# Altium PCB main.PcbDoc
Units mm, origin at the board's own origin, x right, y up, seen from the top; angles counter-clockwise.
Board outline 187.3 x 121.8 mm, 2 copper layers (Top Layer, Bottom Layer); 110 components, 126 nets, 418 pads, 274 vias.
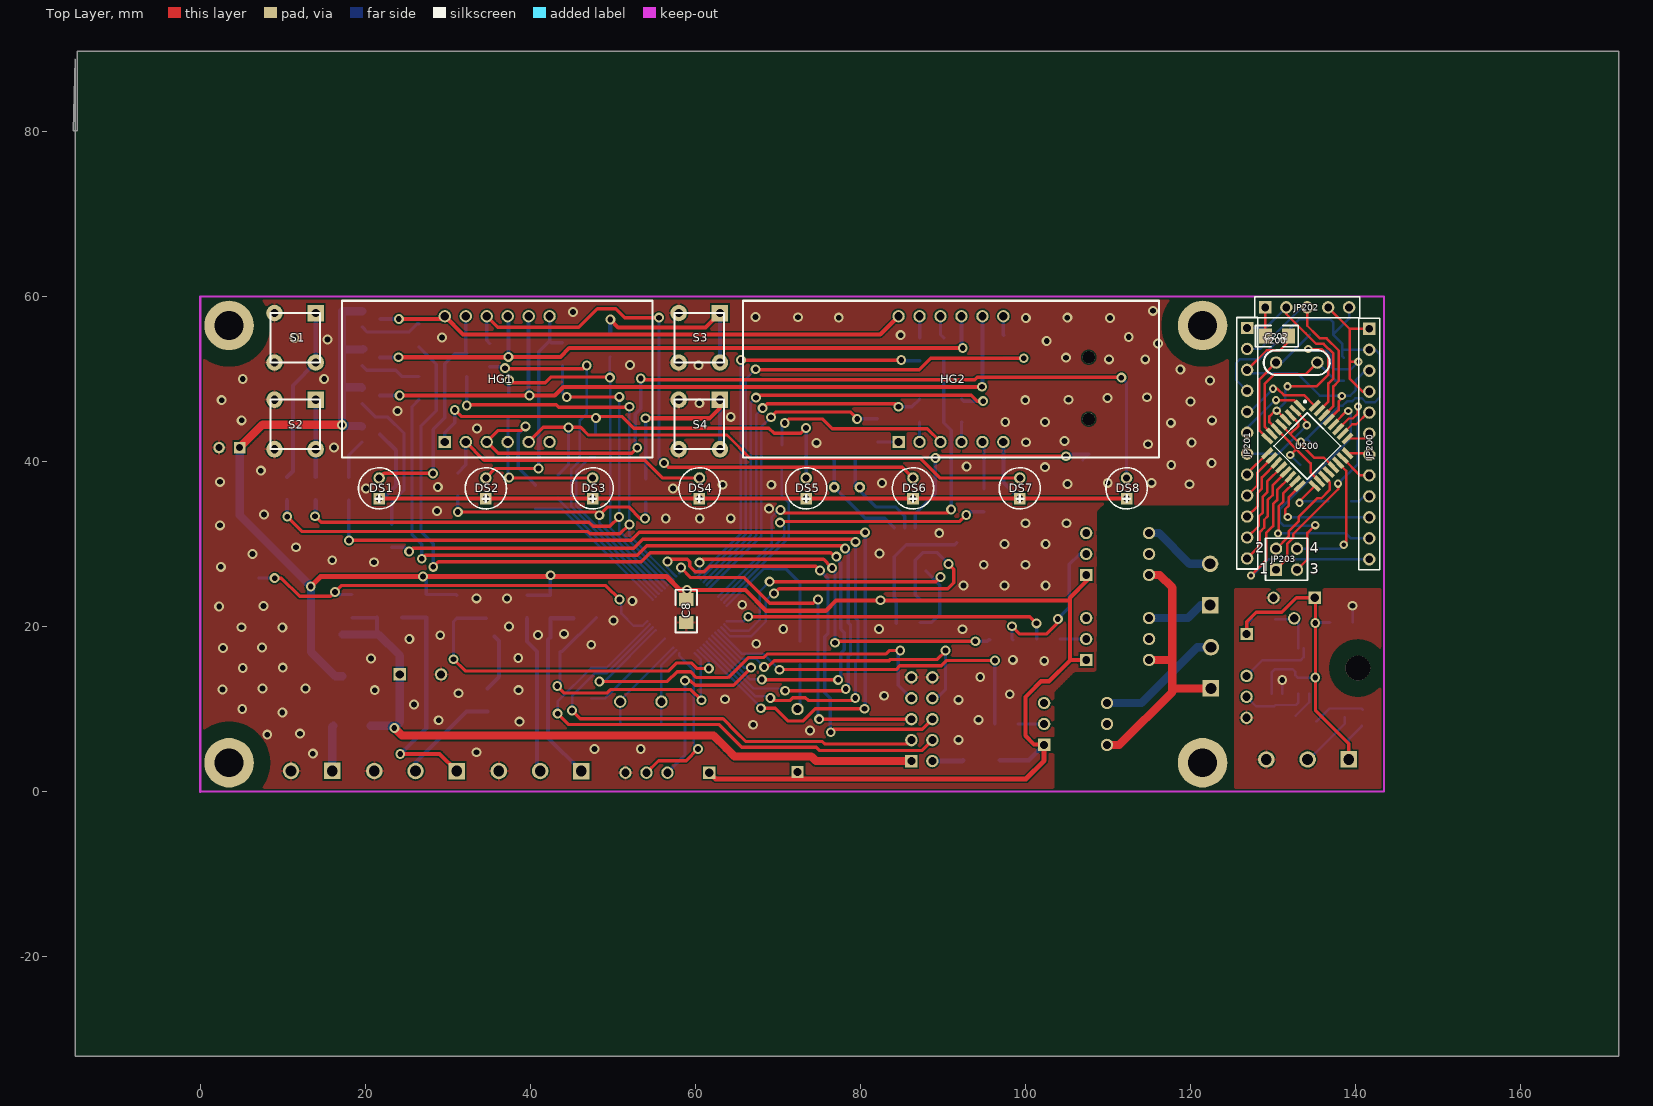
[diagram p0: Top Layer view]
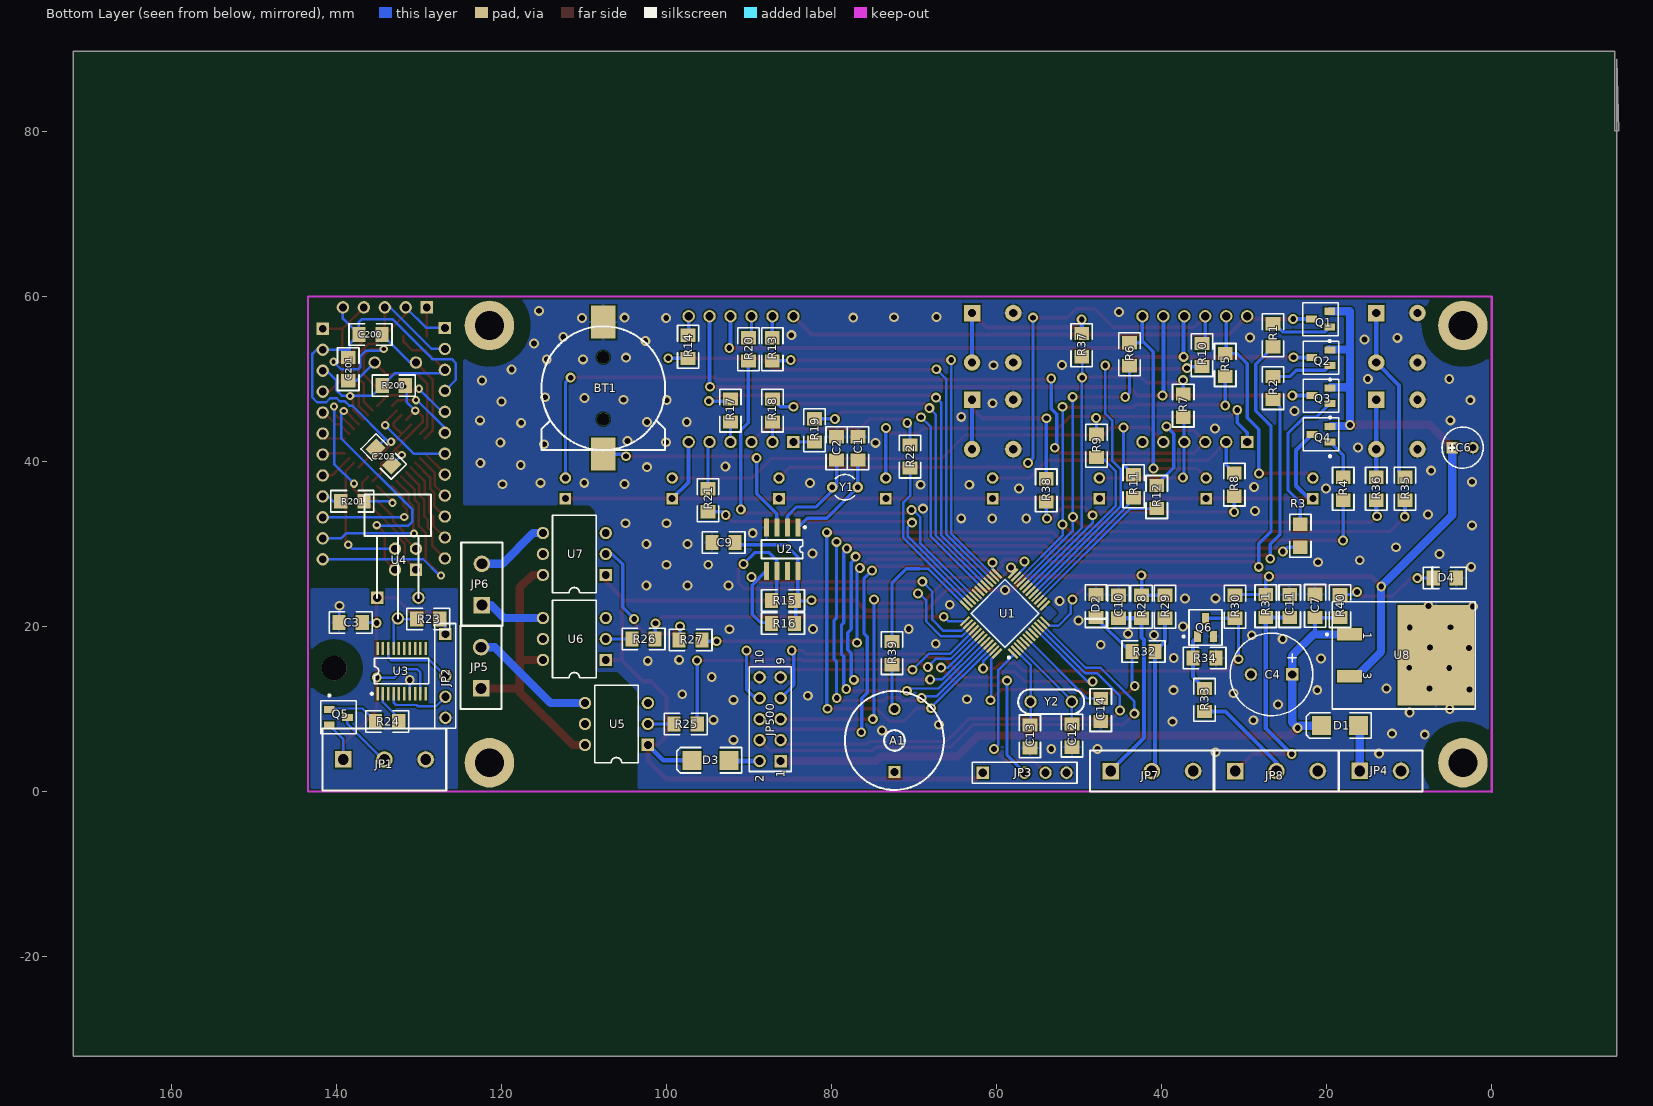
[diagram p1: Bottom Layer view, seen from below]

## Layer stack, top to bottom
Top Layer: signal copper 0.0356
Dielectric: dielectric 0.32, FR-4, Dk 4.8
Bottom Layer: signal copper 0.0356

## Board outline
-15.15,88.8 -15.15,-32.075 171.925,-32.075 171.925,89.725 -14.925,89.725 -14.925,80.075 -15.375,80.075

## Design rules (kind name [scope] priority, off if disabled: settings)
Clearance Clearance_1 [HasPad('Free-0') vs InPoly] p1: gap=2
Clearance [All] p2: gap=0.2
ComponentClearance [All] p1: gap=0.254 collisioncheckmode=0
HoleSize [All] p1: absolutevalues=TRUE maxlimit=5 minlimit=0.025 maxpercent=80.000 minpercent=20.000
PolygonConnect [All] p1: connectstyle=Relief reliefconductorwidth=0.254 reliefentries=4 polygonreliefangle="90 Angle"
RoutingLayers [All] p1: top layer=Horizontal bottom layer=Vertical
RoutingVias [All] p1: holewidth=0.6 width=1.1 viastyle="Through Hole" minholewidth=0.6 minwidth=1.1 maxholewidth=1 maxwidth=1.5
SolderMaskExpansion [All] p1: expansion=0.102
TestPointUsage [All] p1: valid=0 allowmultiple=FALSE
Testpoint [All] p1: side=15 testpointundercomponent=TRUE minsize=1.016 maxsize=2.54 preferedsize=1.524 minholesize=0 maxholesize=1.016 preferedholesize=0.813 testpointgrid=0.025 style=1023 order=-539222988
Width [All] p1: maxlimit=3 minlimit=0.2 preferedwidth=0.254 toplayer_prefwidth=0.3 bottomlayer_prefwidth=0.3 minimp=50.000000 maximp=50.000000 favimp=50.000000
15 further rules are at their usual default settings.

## Classes and differential pairs
component class AM: C200 C201 C202 C203 JP200 JP201 JP202 JP203 R200 R201 U200 Y200
component class Dat: C3 JP1 JP2 Q5 R23 R24 U3 U4
component class main: A1 BT1 C1 C2 C4 C6 C7 C8 C9 C10 C11 C12 C13 C14 D1 D2 D3 D4 DS1 DS2 DS3 DS4 DS5 DS6 DS7 DS8 HG1 HG2 JP3 JP4 JP5 JP6 JP7 JP8 JP500 Q1 Q2 Q3 Q4 Q6 R1 R2 R3 R4 R5 R6 R7 R8 R9 R10 R11 R12 R13 R14 R15 R16 R17 R18 R19 R20 R21 R22 R25 R26 R27 R28 R29 R30 R31 R32 R33 R34 R35 R36 R37 R38 R39 R40 S1 S2 S3 S4 U1 U2 U5 U6 U7 U8 Y1 Y2

## Components (designator, comment, footprint, x,y, rotation, side; value= is the part's Value field where it differs from the comment)
A1 "EFM260" zumm 72.4,6.2 r90 bottom
BT1 "CR2032" 1220_holder 107.7,48.9 r270 bottom
C1 "10" _1206 76.8,41.6 r270 bottom
C2 "10" _1206 79.4,41.6 r270 bottom
C3 "1.0" _1206 138.324,20.5 r0 bottom
C4 "" el5 29.2,14.2 r180 bottom
C6 "" el3 4.8,41.7 r180 bottom
C7 "Cap" _1206 21.4,22.5 r270 bottom
C8 "Cap" _1206 58.9,21.9 r90 top
C9 "Cap" _1206 93.1,30.2 r180 bottom
C10 "Cap" _1206 45.25,22.425 r90 bottom
C11 "Cap" _1206 24.5,22.5 r90 bottom
C12 "10" _1206 50.9,6.8 r90 bottom
C13 "10" _1206 56,6.7 r90 bottom
C14 "1.0" _1206 47.4,9.9 r90 bottom
C200 "10" _1206 135.9,55.4 r180 bottom
C201 "10" _1206 138.6,51.2 r270 bottom
C202 "1n0" _1206 130.5,55.2 r180 top
C203 "1.0" _1206 134.3,40.6 r225 bottom
D1 "10BQ100" DSO-C2/X2.3#1 18.4,8 r0 bottom
D2 "C5V6" _1206d 48,22.5 r90 bottom
D3 "10BQ100" DSO-C2/X2.3#2 94.7,3.8 r0 bottom (schematic designator D?)
D4 "C5V6" _1206d 5.7,25.9 r180 bottom
DS1 "LED0" el3 21.675,35.5 r90 top
DS2 "LED0" el3 34.618,35.5 r90 top
DS3 "LED0" el3 47.561,35.5 r90 top
DS4 "LED0" el3 60.504,35.5 r90 top
DS5 "LED0" el3 73.446,35.5 r90 top
DS6 "LED0" el3 86.389,35.5 r90 top
DS7 "LED0" el3 99.332,35.5 r90 top
DS8 "LED0" el3 112.275,35.5 r90 top
HG1 "HS310561K" HS310561K 36,50 r0 top
HG2 "HS410561K" HS410561K 91,50 r0 top
JP1 "Header 3" BT5-3 139.224,3.9 r180 bottom
JP2 "" HDR1X5_uart 126.824,19.1 r270 bottom
JP3 "" HDR1X5_uart 61.7,2.3 r180 bottom
JP4 "Header 2" BT5-2 16.012,2.5 r180 bottom
JP5 "Header 2" BT5-2 122.5,12.5 r90 bottom
JP6 "Header 2" BT5-2 122.4,22.6 r90 bottom
JP7 "Header 3" BT5-3 46.2,2.5 r180 bottom
JP8 "Header 3" BT5-3 31.1,2.5 r180 bottom
JP200 "Header 12" HDR1X12 141.7,56.1 r270 top
JP201 "Header 12" HDR1X12 126.9,56.2 r270 top
JP202 "Header 5" HDR1X5 129.1,58.7 r0 top
JP203 "Header 2X2H" HDR2X2 130.4,26.9 r0 top
JP500 "IDC-10" HDR2X5 86.2,3.7 r90 bottom
Q1 "BC807" SO-G3#1 20.75,57.274 r90 bottom
Q2 "BC807" SO-G3#2 15.7,52.6 r90 bottom
Q3 "BC807" SO-G3#1 20.7,48 r90 bottom
Q4 "BC807" SO-G3#1 20.7,43.3 r90 bottom
Q5 "BC807" SO-G3#1 139.8,9 r270 bottom
Q6 "BC847" SO-G3#1 34.7,19.9 r180 bottom
R1 "Res2" _1206 26.5,55.3 r270 bottom
R2 "Res2" _1206 26.5,48.9 r270 bottom
R3 "Res2" _1206 23.2,31 r270 bottom
R4 "Res2" _1206 18,36.7 r270 bottom
R5 "Res2" _1206 32.3,51.7 r270 bottom
R6 "Res2" _1206 43.9,53 r270 bottom
R7 "Res2" _1206 37.4,46.8 r90 bottom
R8 "Res2" _1206 31.2,37.2 r270 bottom
R9 "Res2" _1206 47.9,41.9 r270 bottom
R10 "Res2" _1206 35.1,52.9 r270 bottom
R11 "Res2" _1206 43.4,37 r270 bottom
R12 "Res2" _1206 40.6,35.7 r270 bottom
R13 "Res2" _1206 87.2,53.6 r270 bottom
R14 "Res2" _1206 97.4,53.9 r270 bottom
R15 "Res2" _1206 85.925,23.175 r0 bottom
R16 "Res2" _1206 85.925,20.375 r0 bottom
R17 "Res2" _1206 92.3,46.2 r90 bottom
R18 "Res2" _1206 87.2,46.2 r90 bottom
R19 "Res2" _1206 82.1,43.8 r90 bottom
R20 "Res2" _1206 90.1,53.6 r270 bottom
R21 "Res2" _1206 95,35.3 r270 bottom
R22 "Res2" _1206 70.5,40.6 r270 bottom
R23 "Res2" _1206 128.924,20.9 r0 bottom
R24 "Res2" _1206 133.9,8.5 r0 bottom
R25 "Res2" _1206 97.7,8.2 r180 bottom
R26 "Res2" _1206 102.8,18.5 r180 bottom
R27 "Res2" _1206 97.1,18.4 r180 bottom
R28 "Res2" _1206 42.45,22.425 r90 bottom
R29 "Res2" _1206 39.6,22.4 r270 bottom
R30 "Res2" _1206 31.1,22.4 r270 bottom
R31 "Res2" _1206 27.4,22.5 r90 bottom
R32 "4K7" _1206 42.2,17 r180 bottom
R33 "4K7" _1206 34.8,11.1 r270 bottom
R34 "10K" _1206 34.8,16.2 r180 bottom
R35 "Res2" _1206 10.5,36.7 r270 bottom
R36 "Res2" _1206 14,36.7 r270 bottom
R37 "Res2" _1206 49.7,54.1 r270 bottom
R38 "Res2" _1206 54,36.5 r270 bottom
R39 "Res2" _1206 72.7,16.8 r90 bottom
R40 "4K7" _1206 18.4,22.5 r90 bottom
R200 "10K" _1206 133.1,49.2 r0 bottom
R201 "1K0" _1206 138.1,35.2 r180 bottom (schematic designator R?)
S1 "SWT-6" SWT-6 14,58 r270 top
S2 "SWT-6" SWT-6 14,47.5 r270 top
S3 "SWT-6" SWT-6 63,58 r270 top
S4 "SWT-6" SWT-6 63,47.5 r270 top
U1 "STM8S007C8" F-QFP7X7-G48/X.3N 59,21.6 r45 bottom
U2 "DS1307Z" SO-G8/Z7.45 86.025,29.375 r0 bottom
U3 "STM8S103F" TSSO6x6-G20/Y1.6 132.124,14.6 r180 bottom
U4 "DS18B20" DS18B20_H 135.1,21 r90 bottom
U5 "Opto TRIAC" DIP-6 106.1,8.2 r90 bottom
U6 "Opto TRIAC" DIP-6 111.2,18.5 r90 bottom
U7 "Opto TRIAC" DIP-6 111.2,28.8 r90 bottom
U8 "MC7805ACD2T" D2PAK 12,16.5 r270 bottom
U200 "ATmega8" QFP7X7-G32/X.5N 134.2,41.9 r315 top
Y1 "32768" BCY-W2/D3.1 78.4,36.9 r270 bottom
Y2 "10MGz" qwarz1 50.9,10.9 r0 bottom
Y200 "16MGz" qwarz1 130.4,52 r0 top

## Footprints (in the part's own frame and the unit in brackets; to place one, negate y for a bottom-side part, rotate by r counter-clockwise, add the part's x,y. Pads: shape width x height; smd on the part's side, far side on the other; paste and mask are expansions set on the pad)
1220_holder [mm]
  round 1.5 hole 1.5: 0(-3.75,0) 0(3.75,0)
  rect 4x3 smd: 1(8,0) 2(-8,0)
  silkscreen extent -7.5,-7.5 7.52,7.5
_1206 [mm]
  rect 1.6x1.8 smd: 1(-1.412,-0.007) 2(1.388,-0.007)
  silkscreen extent -2.61,-1.31 2.59,1.29
_1206d [mm]
  rect 1.6x1.8 smd: 1(1.395,-0.009) 2(-1.405,-0.009)
  silkscreen extent -2.6,-1.31 2.6,1.29
BCY-W2/D3.1 [mm]
  round 1.3 hole 0.7: 1(0,1.55) 2(0,-1.55)
  silkscreen extent -1.55,-1.19 1.55,1.17
BT5-2 [mm]
  rect 2x2 hole 1.3: 1(0.006,0.008)
  round 2 hole 1.3: 2(5.006,0.008)
  silkscreen extent -2.49,-2.49 7.61,2.51
BT5-3 [mm]
  round 2 on Bottom Overlay: 0(-0.001,-4.001)
  rect 2x2 hole 1.3: 1(-0.001,-0.001)
  round 2 hole 1.3: 2(4.999,-0.001) 3(9.999,-0.001)
  silkscreen extent -2.5,-3.75 12.5,3.75
D2PAK [mm]
  rect 1.5x3 smd: 1(-2.558,-5.253) 3(2.522,-5.253)
  rect 12.2x9.3 smd: 4(-0.018,5.247)
  silkscreen extent -6.52,-8.1 6.48,10
DIP-6 [mm]
  rect 1.5x1.5 hole 0.95: 1(-2.54,-3.81)
  round 1.5 hole 0.95: 2(0,-3.81) 3(2.54,-3.81) 4(2.54,3.81) 5(0,3.81) 6(-2.54,3.81)
  silkscreen extent -4.7,-2.65 4.7,2.65
DS18B20_H [mm]
  rect 1.5x1.5 hole 1: 1(2.5,0)
  round 1.5 hole 1: 2(0,-2.5) 3(2.5,-5)
  silkscreen extent 0,-6.53 15,1.53
DSO-C2/X2.3#1 [mm]
  rect 2.3x2.3 smd: 1(-2.252,0.001) 2(2.248,0.001)
  silkscreen extent -3.8,-1.55 4.1,1.55
DSO-C2/X2.3#2 [mm]
  rect 2.3x2.3 smd: 1(-2.25,0) 2(2.25,0)
  silkscreen extent -3.8,-1.55 4.1,1.55
el3 [mm]
  rect 1.4x1.4 hole 0.85: 1(0.011,-0.008)
  round 1.4 hole 0.85: 2(2.511,-0.008)
  silkscreen extent -1.24,-2.51 3.76,2.49
el5 [mm]
  rect 1.5x1.5 hole 1: 1(5.001,0.007)
  round 1.5 hole 1: 2(0.001,0.007)
  silkscreen extent -2.5,-4.99 7.5,5.01
F-QFP7X7-G48/X.3N [mm]
  rect 1.6x0.3 smd: 1(-4.1,2.75) 2(-4.1,2.25) 3(-4.1,1.75) 4(-4.1,1.25) 5(-4.1,0.75) 6(-4.1,0.25) 7(-4.1,-0.25) 8(-4.1,-0.75) 9(-4.1,-1.25) 10(-4.1,-1.75) 11(-4.1,-2.25) 12(-4.1,-2.75) 25(4.1,-2.75) 26(4.1,-2.25) 27(4.1,-1.75) 28(4.1,-1.25) 29(4.1,-0.75) 30(4.1,-0.25) 31(4.1,0.25) 32(4.1,0.75) 33(4.1,1.25) 34(4.1,1.75) 35(4.1,2.25) 36(4.1,2.75)
  rect 0.3x1.6 smd: 13(-2.75,-4.1) 14(-2.25,-4.1) 15(-1.75,-4.1) 16(-1.25,-4.1) 17(-0.75,-4.1) 18(-0.25,-4.1) 19(0.25,-4.1) 20(0.75,-4.1) 21(1.25,-4.1) 22(1.75,-4.1) 23(2.25,-4.1) 24(2.75,-4.1) 37(2.75,4.1) 38(2.25,4.1) 39(1.75,4.1) 40(1.25,4.1) 41(0.75,4.1) 42(0.25,4.1) 43(-0.25,4.1) 44(-0.75,4.1) 45(-1.25,4.1) 46(-1.75,4.1) 47(-2.25,4.1) 48(-2.75,4.1)
  silkscreen extent -4.22,-2.9 2.9,3.57
HDR1X5 [mm]
  rect 1.5x1.5 hole 0.95: 1(0,0)
  round 1.5 hole 0.95: 2(2.54,0) 3(5.08,0) 4(7.62,0) 5(10.16,0)
  silkscreen extent -1.27,-1.27 11.43,1.27
HDR1X5_uart [mm]
  rect 1.5x1.5 hole 1: 1(-0.008,-0.009)
  round 1.5 hole 1: 3(5.072,-0.009) 4(7.612,-0.009) 5(10.152,-0.009)
  silkscreen extent -1.28,-1.28 11.42,1.26
HDR1X12 [mm]
  rect 1.5x1.5 hole 0.95: 1(0,0)
  round 1.5 hole 0.95: 2(2.54,0) 3(5.08,0) 4(7.62,0) 5(10.16,0) 6(12.7,0) 7(15.24,0) 8(17.78,0) 9(20.32,0) 10(22.86,0) 11(25.4,0) 12(27.94,0)
  silkscreen extent -1.27,-1.27 29.21,1.27
HDR2X2 [mm]
  rect 1.5x1.5 hole 0.95: 1(0,0)
  round 1.5 hole 0.95: 2(0,2.54) 3(2.54,0) 4(2.54,2.54)
  silkscreen extent -1.27,-1.27 3.81,3.81
HDR2X5 [mm]
  rect 1.5x1.5 hole 0.95: 1(0,0)
  round 1.5 hole 0.95: 2(0,2.54) 3(2.54,0) 4(2.54,2.54) 5(5.08,0) 6(5.08,2.54) 7(7.62,0) 8(7.62,2.54) 9(10.16,0) 10(10.16,2.54)
  silkscreen extent -1.27,-1.27 11.43,3.81
HS310561K [mm]
  rect 1.5x1.5 hole 1: 1(-6.35,-7.62)
  round 1.5 hole 1: 2(-3.81,-7.62) 3(-1.27,-7.62) 4(1.27,-7.62) 5(3.81,-7.62) 6(6.35,-7.62) 7(6.35,7.62) 8(3.81,7.62) 9(1.27,7.62) 10(-1.27,7.62) 11(-3.81,7.62) 12(-6.35,7.62)
  silkscreen extent -18.8,-9.5 18.8,9.5
HS410561K [mm]
  rect 1.5x1.5 hole 1: 1(-6.35,-7.62)
  round 1.5 hole 1: 2(-3.81,-7.62) 3(-1.27,-7.62) 4(1.27,-7.62) 5(3.81,-7.62) 6(6.35,-7.62) 7(6.35,7.62) 8(3.81,7.62) 9(1.27,7.62) 10(-1.27,7.62) 11(-3.81,7.62) 12(-6.35,7.62)
  silkscreen extent -25.2,-9.5 25.2,9.5
QFP7X7-G32/X.5N [mm]
  rect 1.65x0.5 smd: 1(-4.082,2.794) 2(-4.082,1.994) 3(-4.082,1.194) 4(-4.082,0.394) 5(-4.082,-0.406) 6(-4.082,-1.206) 7(-4.082,-2.006) 8(-4.082,-2.806) 17(4.068,-2.806) 18(4.068,-2.006) 19(4.068,-1.206) 20(4.068,-0.406) 21(4.068,0.394) 22(4.068,1.194) 23(4.068,1.994) 24(4.068,2.794)
  rect 0.5x1.65 smd: 9(-2.807,-4.081) 10(-2.007,-4.081) 11(-1.207,-4.081) 12(-0.407,-4.081) 13(0.393,-4.081) 14(1.193,-4.081) 15(1.993,-4.081) 16(2.793,-4.081) 25(2.793,4.069) 26(1.993,4.069) 27(1.193,4.069) 28(0.393,4.069) 29(-0.407,4.069) 30(-1.207,4.069) 31(-2.007,4.069) 32(-2.807,4.069)
  silkscreen extent -4.13,-2.86 2.84,3.72
qwarz1 [mm]
  round 1.5 hole 1: 1(0.008,0) 2(5.008,0)
  silkscreen extent -1.49,-1.5 6.51,1.5
SO-G3#1 [mm]
  rect 0.85x1.3 smd: 1(-0.948,-1.102) 2(0.952,-1.102) 3(0.002,1.098)
  silkscreen extent -2.77,-2.15 2,2.15
SO-G3#2 [mm]
  rect 0.85x1.3 smd: 1(-0.948,3.906) 2(0.952,3.906) 3(0.002,6.106)
  silkscreen extent -2.77,2.86 2,7.16
SO-G8/Z7.45 [mm]
  rect 0.6x2.2 smd: 1(-1.905,-2.625) 2(-0.635,-2.625) 3(0.635,-2.625) 4(1.905,-2.625) 5(1.905,2.625) 6(0.635,2.625) 7(-0.635,2.625) 8(-1.905,2.625)
  silkscreen extent -2.88,-2.79 2.5,1.13
SWT-6 [mm]
  rect 2x2 hole 1: 1(-0.009,-0.001)
  round 2 hole 1: 1(5.991,-0.001) 2(-0.009,-5.001) 2(5.991,-5.001)
  silkscreen extent -0.01,-5.5 5.99,0.5
TSSO6x6-G20/Y1.6 [mm]
  rect 0.3x1.6 smd: 1(-2.934,-2.743) 2(-2.284,-2.743) 3(-1.634,-2.743) 4(-0.984,-2.743) 5(-0.334,-2.743) 6(0.316,-2.743) 7(0.966,-2.743) 8(1.616,-2.743) 9(2.266,-2.743) 10(2.916,-2.743) 11(2.916,2.757) 12(2.266,2.757) 13(1.616,2.757) 14(0.966,2.757) 15(0.316,2.757) 16(-0.334,2.757) 17(-0.984,2.757) 18(-1.634,2.757) 19(-2.284,2.757) 20(-2.934,2.757)
  silkscreen extent -3.76,-2.87 3.29,1.56
zumm [mm]
  rect 1.5x1.5 hole 1: 1(-3.825,0)
  round 1.5 hole 1: 2(3.81,0)
  silkscreen extent -6,-6 6,6

## Part data
A1: library part PJEZ0, "Beeper"
BT1: library part Battery, "Multicell Battery"
C1 C2 C3 C12 C13 C14 C200 C201 C202 C203: library part "Cap Semi", "Capacitor"
C4: library part "Cap Pol1", "Polarized Capacitor (Radial)"
C6: library part "Cap Pol", "Polarized Capacitor (Radial)"
C7 C8 C9 C10 C11: "Capacitor"
D1 D3: library part 10BQ015, "Schottky Rectifier"
D2 D4: library part "D Zener", "Zener Diode"
DS1 DS2 DS3 DS4 DS5 DS6 DS7 DS8: "Typical INFRARED GaAs LED"
JP1 JP7 JP8: "Header, 3-Pin"
JP2 JP3: library part SWIM_CONN
JP4 JP5 JP6: "Header, 2-Pin"
JP200 JP201: "Header, 12-Pin"
JP202: "Header, 5-Pin"
JP203: "Header, 2-Pin, Dual row,  Right Angle"
JP500: library part "Header 10", "Header, 10-Pin"
Q1 Q2 Q3 Q4 Q5: library part BC857ALT1, "General Purpose Transistor PNP Silicon"
Q6: library part BC847ALT1, "General Purpose Transistor NPN Silicon"
R1 R2 R3 R4 R5 R6 R7 R8 R9 R10 R11 R12 R13 R14 R15 R16 R17 R18 R19 R20 R21 R22 R23 R24 R25 R26 R27 R28 R29 R30 R31 R35 R36 R37 R38 R39: "Resistor"
R32 R33 R34 R40 R200 R201: library part Res2, "Resistor"
S1 S2 S3 S4: "Switch"
U2: "64 X 8 Serial Real-Time Clock"
U5 U6 U7: "Opto-Triac"
U8: "Three-Terminal Positive Voltage Regulator"
U200: library part ATmega48/TQFP
Y1 Y2 Y200: library part XTAL, "Crystal Oscillator"

## Free pads (board coordinates)
  round 6 hole 3.5: 0(3.5,3.5) 0(3.5,56.5) 0(121.5,56.5) 1(121.5,3.5)
  round 3 hole 3: 0(140.324,14.975)

## Via types
v1: diameter 1.2, hole 0.7, Top Layer to Bottom Layer, 255 vias
v2: diameter 1, hole 0.5, Top Layer to Bottom Layer, 19 vias

## Nets (pads, with @x,y where several pads share a name; then routed paths per layer and width w, separated by ;. In a path a pad name is that pad's centre, name@x,y a point inside that pad or via, vN(x,y) a via of type N, cw(c..) or ccw(c..) an arc to the next point about the centre after c; other vN are vias at no path point)
+5V: A1.1 C6.1 C8.2 C9.2 D3.2 JP3.1 Q1.2 Q2.2 Q3.2 Q4.2 R15.1 R16.1 R28.2 R29.1 R30.1 R31.2 U1.7 U1.8 U1.13 U1.32 U2.8 U5.1 U6.1 U7.1 U8.3 | length 273.2
  Top Layer w0.5: v1@59.05,24.425 66.075,24.425 68.575,21.925 75.825,21.925 77.05,23.15 105.425,23.15 ; 101.275,12.75 101.9,13.375 102.9,13.375 105.425,15.9 105.425,23.5 107.5,25.575 107.5,26.15 U7.1 ; 101.288,12.737 100.025,11.475 100.025,6.775 101.075,5.725 U5.1@102.375,5.725 ; 105.425,15.96 U6.1
  Top Layer w0.6: v1@13.388,24.863 14.6,26.075 56.55,26.075 58.2,24.425 v1@59.05,24.425 ; JP3.1 62.473,1.525 100.075,1.525 102.29,3.74 U5.1
  Top Layer w1: C6.1 7.572,44.475 17.25,44.475 v1(17.2,44.425)
  Bottom Layer w0.4: v1(27,26.075) 27.393,25.682 R31.2 31.031,23.888 R30.1 ; R29.1 R28.2 ; R28.2 42.443,26.193 v1(42.475,26.225) ; v1(82.45,23.2) 82.55,23.1 R15.1@84.375,23.1 ; R16.1@84.375,20.375 84.375,23.319 84.12,23.574 84.12,28.495 85.55,29.925 91.444,29.925 C9.2
  Bottom Layer w0.6: D3.2 100.43,3.8 U5.1
  Bottom Layer w1: C6.1 4.789,33.511 v1@13.425,24.875 ; v1@13.425,24.85 13.425,16.95 16.397,13.978 U8.3 ; 17.2,49 19.549,49 Q3.2 ; 17.2,53.575 19.675,53.575 Q2.2@19.75,53.65 ; Q4.2 19.524,44.325 17.2,44.325 17.2,58.201 17.224,58.226 Q1.2
  other v1: 59,24.425 13.4,24.85
+5VA: C203.2 JP200.1 JP200.4 JP202.4 R200.1 U200.4 U200.6 U200.18 | length 55
  Top Layer w0.3: U200.4 v2(130.482,46.175) 130.3,46.175 129.6,45.475 129.6,44.794 134.6,39.794 134.6,38.663 U200.18 ; v2(131.775,49.125) 135.325,49.125 136.75,50.55 136.75,52.8 135.9,53.65 v2(134.3,53.65) ; v2(132.125,40.8) 132.875,41.55 132.9,41.55 ; JP202.4 139.32,56.1 ; 139.32,52.125 139.345,52.1 v2(140.375,52.1) ; JP200.4@141.9,48.48 140.895,48.48 139.32,50.055 139.32,56.1 ; JP200.1@141.9,56.1 139.32,56.1
  Bottom Layer w0.3: v2(130.482,46.175) 131.525,47.218 131.525,49.044 R200.1 131.718,49.207 131.775,49.15 v2(131.775,49.125) ; v2(132.125,40.8) 133.311,39.614 C203.2 ; v2(134.3,53.65) 134.525,53.425 136.5,53.425 137.175,52.75 137.175,51.425 137.4,51.2 139.475,51.2 v2(140.375,52.1)
+12V: C4.1 C7.2 D1.2 JP500.1 R40.1 U8.1 | length 89.5
  Top Layer w1: v1(23.525,7.725) 24.45,6.8 62.225,6.8 63.76,5.265 64.775,4.25 74.075,4.25 74.625,3.7 JP500.1
  Bottom Layer w0.4: R40.1 21.382,21.088 C7.2
  Bottom Layer w0.5: 21.325,19.058 21.407,19.14 C7.2
  Bottom Layer w1: U8.1 21.617,19.058 24.199,16.476 24.199,8.399 v1(23.525,7.725) 23.251,7.999 D1.2
A1: HG1.12 HG2.12 Q1.3 | length 64.8
  Top Layer w0.5: v1(24.074,57.276) 29.306,57.276 HG1.12 31.87,55.4 82.43,55.4 HG2.12
  Bottom Layer w0.5: Q1.3 v1(24.074,57.276)
A2: HG1.9 HG2.9 Q2.3 | length 80
  Top Layer w0.5: v1(24.05,52.65) 37.3,52.65 v1(37.35,52.7) 43.675,52.7 44.725,53.75 92.4,53.75 v1(92.425,53.775)
  Bottom Layer w0.5: Q2.3 24.002,52.602 v1(24.05,52.65) ; HG1.9 37.35,57.54 v1(37.35,52.7) ; HG2.9 92.27,53.93 v1(92.425,53.775)
A3: HG1.8 HG2.8 Q3.3 | length 91.7
  Top Layer w0.5: v1(24.175,48) v1(39.9,48) 42.975,48 44,49.025 83.55,49.025 94.775,49.025 94.825,49.075 v1(94.775,49.075)
  Bottom Layer w0.5: Q3.3 23.923,48.002 23.925,48 v1(24.175,48) ; HG1.8 39.81,48.09 v1(39.9,48) ; v1(94.775,49.075) 94.81,49.11 HG2.8
A4: DS1.1 DS2.1 DS3.1 DS4.1 DS5.1 DS6.1 DS7.1 DS8.1 HG2.6 Q4.3 | length 108
  Top Layer w0.5: DS1.1 DS8.1
  Bottom Layer w0.5: DS1.1 22.161,35.511 23.725,37.075 23.725,41.374 Q4.3 ; HG2.6 97.375,42.355 97.375,37.477 DS7.1
AA: DS1.2 HG1.11 R5.1 | length 28.4
  Top Layer w0.4: DS1.2 22.272,38.6 28.175,38.6 v1(28.2,38.575)
  Bottom Layer w0.4: v1(28.2,38.575) 28.25,38.625 28.25,43.9 29.65,45.3 29.65,51.875 30.887,53.112 R5.1 32.19,53.229 HG1.11
AB: HG2.11 R13.1 | length 2.6
  Bottom Layer w0.4: HG2.11 87.207,57.603 R13.1
ADC4: JP203.1 U200.27 | length 27.9
  Top Layer w0.3: JP203.1 131.75,28.25 131.75,30 132.475,30.725 132.475,31.2 137.925,36.65 v2(137.925,37.325) ; U200.27 139.212,45.225 139.7,45.225 140.325,45.85 v2(140.325,46.675)
  Bottom Layer w0.3: v2(137.925,37.325) 140.325,39.725 v2(140.325,46.675)
ADC5: JP203.3 U200.28 | length 30.7
  Top Layer w0.3: JP203.3 134.2,28.16 134.2,31.35 v2(135.15,32.3) ; U200.28 137.355,44.53 v2@139.125,46.3
  Bottom Layer w0.3: v2(135.15,32.3) 135.1,32.25 131.325,32.25 130.825,32.75 130.825,34.2 139.45,42.825 139.45,45.975 v2@139.125,46.3
  other v2: 139.15,46.125
ADC6: JP203.2 U200.19 | length 12
  Top Layer w0.3: JP203.2 130.44,29.44 131.925,30.925 131.925,31.55 133.125,32.75 133.125,33.3 135.375,35.55 135.875,35.55 136.9,36.575 136.9,37.494 U200.19
ADC7: JP203.4 U200.22 | length 16.3
  Top Layer w0.3: U200.22 138.9,38.888 138.9,30.225 v2(138.6,29.925)
  Bottom Layer w0.3: JP203.4 138.115,29.44 v2(138.6,29.925)
BA: DS2.2 HG1.7 R6.1 | length 27.5
  Top Layer w0.4: DS2.2 35.79,39.175 v1(41,39.175)
  Bottom Layer w0.4: v1(41,39.175) 41.025,39.2 41.025,53.3 42.35,54.625 ; HG1.7 42.35,54.625 ; R6.1 42.563,54.412 42.35,54.625
BB: HG2.7 R14.1 | length 2.3
  Bottom Layer w0.4: HG2.7 97.35,55.369 R14.1
CA: DS3.2 HG1.4 R7.1 | length 17.6
  Top Layer w0.4: v1(37.45,38.075) 37.514,38.011 DS3.2
  Bottom Layer w0.4: R7.1 37.3,45.294 37.3,38.225 v1(37.45,38.075)
CB: HG2.4 R17.1 | length 2.4
  Bottom Layer w0.4: HG2.4 92.27,44.764 R17.1
DA: DS4.2 HG1.2 R8.1 | length 34.3
  Top Layer w0.4: HG1.2 34.395,40.175 53.875,40.175 56.039,38.011 DS4.2
  Bottom Layer w0.4: R8.1 32.19,39.596 HG1.2
DB: HG2.2 R18.1 | length 2.4
  Bottom Layer w0.4: HG2.2 87.19,44.784 R18.1
DTR: C202.2 JP202.1 | length 3.5
  Top Layer w0.3: JP202.1 129.1,55.219 C202.2
EA: DS5.2 HG1.1 R9.1 | length 56.6
  Top Layer w0.4: v1(30.85,46.25) 31.625,45.475 51.1,45.475 52.525,44.05 68.925,44.05 69.55,43.425 72.775,43.425 v1(73.425,44.075) ; v1@47.775,45.475 v1(47.95,45.3)
  Bottom Layer w0.4: HG1.1 29.65,43.5 30.85,44.7 v1(30.85,46.25) ; R9.1 v1@47.907,45.257 ; v1(73.425,44.075) 73.455,44.045 DS5.2
EB: HG2.1 R19.1 | length 2.6
  Bottom Layer w0.4: R19.1 84.642,42.388 HG2.1
FA: DS6.2 HG1.10 R10.1 | length 75.1
  Top Layer w0.4: HG1.10 36.075,56.275 45.9,56.275 48.15,58.525 50.375,58.525 51.45,57.45 v1(55.6,57.45) ; v1(56.225,39.825) 56.725,39.325 85.084,39.325 DS6.2
  Bottom Layer w0.4: HG1.10 34.73,54.689 R10.1 ; v1(55.6,57.45) 55.6,40.45 v1(56.225,39.825)
FB: HG2.10 R20.1 | length 2.8
  Bottom Layer w0.4: HG2.10 89.73,55.389 R20.1
GA: DS7.2 HG1.5 R11.1 | length 69.1
  Top Layer w0.4: HG1.5 41.58,44.15 46.1,44.15 47.025,43.225 63.85,43.225 66.7,40.375 87.35,40.375 89.714,38.011 DS7.2
  Bottom Layer w0.4: R11.1 44.65,39.656 v1(44.65,44.15)
GB: HG2.5 R21.1 | length 5.7
  Bottom Layer w0.4: HG2.5 95.007,42.183 R21.1
GND: BT1.2 C1.1 C2.1 C4.2 C6.2 C7.1 C8.1 C9.1 C10.2 C11.2 C12.1 C13.1 C14.1 D2.1 D4.1 JP3.5 JP4.2 JP7.3 JP8.3 JP500.9 JP500.10 Q6.2 R34.2 S1.2 S2.2 S3.2 S4.2 U1.4 U1.5 U1.14 U1.31 U2.4 U8.4
  other v1: 13.65,4.6 33.5,4.775 47.8,5.15 53.4,5.15 91.9,6.275 8.125,6.9 12.1,7.025 73.9,7.4 67.025,8.1 38.7,8.475 28.9,8.65 94.35,8.7 9.95,9.6 5.1,10 25.9,10.55 91.9,11.125 63.625,11.2 82.9,11.625 98.125,11.8 31.3,11.925 21.15,12.3 38.575,12.3 2.7,12.375 7.55,12.5 12.775,12.5 94.55,13.9 5.15,15 10,15.025 102.3,15.85 98.5,15.975 20.7,16.15 38.55,16.2 2.75,17.4 7.5,17.475 47.4,17.8 67.4,17.925 25.35,18.5 29.1,18.95 40.95,19 44.1,19.125 92.4,19.675 70.675,19.7 82.275,19.7 9.95,19.9 5,19.925 37.425,20 50.1,20.75 2.3,22.45 7.675,22.5 65.7,22.65 52.375,23.1 37.175,23.4 33.5,23.425 92.525,24.975 97.5,24.975 102.475,24.975 2.5,27.25 94.975,27.5 100.025,27.5 21.075,27.8 16,28.05 6.35,28.8 82.325,28.875 11.6,29.625 97.5,30 102.475,30 89.575,31.325 2.4,32.275 100.025,32.525 105,32.525 56.425,33.1 60.55,33.1 64.3,33.125 7.725,33.6 28.7,34.025 68.95,34.3 20.1,36.75 57.3,36.75 28.8,36.925 63.325,37.2 69.225,37.2 119.9,37.25 105.125,37.3 82.65,37.4 110,37.425 115.3,37.425 2.4,37.55 7.35,38.9 102.4,39.325 92.9,39.4 117.7,39.575 122.6,39.825 16.225,41.7 114.875,42.1 74.7,42.275 120.175,42.3 100.1,42.35 104.75,42.5 33.55,44 117.65,44.7 97.575,44.8 102.4,44.8 5.025,45 122.625,45 64.3,45.425 23.9,46.125 60.5,47.075 120.025,47.3 2.6,47.45 100,47.45 105.25,47.5 109.975,47.7 114.75,47.8 122.4,49.825 5.15,50 15.025,50 118.8,51.15 60.4,51.675 52.1,51.725 110.15,52.4 114.55,52.4 104.925,52.6 116.1,54.3 102.6,54.625 15.425,54.8 11.45,55 29.3,55.05 112.55,55.1 84.9,55.325 100.075,57.4 110.275,57.4 77.4,57.45 105.1,57.45 72.45,57.5 67.3,57.525 45.2,58.15 115.5,58.275
GNDA: C200.1 C201.1 C203.1 JP200.2 JP201.4 JP202.5 U200.3 U200.5 U200.21 | length 62.6
  Top Layer w0.3: U200.5 131.026,44.449 135,40.475 136.182,40.475 U200.21 ; U200.3 133.1,44.688 133.1,44.325 132.175,43.4 ; v2@133.239,42.236 v2(133.404,42.4)
  Bottom Layer w0.3: JP201.4 125.575,49.905 125.575,51.95 126.05,52.425 128.4,52.425 133.25,57.275 136.95,57.275 137.312,56.913 C200.1 ; v2(133.404,42.4) 133.725,42.4 138.1,46.775 138.475,46.775 139,47.3 139.625,47.3 140,47.675 140.8,47.675 141.275,47.2 142.375,47.2 142.95,47.775 142.95,53.05 142.44,53.56 138.49,53.56 138.45,53.6 ; 134.081,42.756 134.142,42.756 C203.1 ; C201.1 138.45,52.769 138.45,54.256 C200.1 ; JP202.5 139.26,57.341 C200.1
HA: DS8.2 HG1.3 R12.1 | length 112.6
  Top Layer w0.4: v1(39.425,44.275) 38.925,43.775 36.125,43.775 HG1.3 36.11,41 52.3,41 v1(52.975,41.675) ; v1(53.4,50.075) 53.55,49.925 93.9,49.925 94.2,50.225 111.6,50.225 v1(111.65,50.175)
  Bottom Layer w0.4: v1(39.425,44.275) 38.55,43.4 38.55,39.25 40.607,37.193 R12.1 ; v1(52.975,41.675) 52.725,41.925 52.725,45.725 53.4,46.4 v1(53.4,50.075) ; v1(111.65,50.175) 112.283,49.542 DS8.2
HB: HG2.3 R22.1 | length 23
  Top Layer w0.4: v1(70.85,44.675) 70.875,44.675 71.375,45.175 75.425,45.175 76.625,43.975 88.135,43.975 HG2.3
  Bottom Layer w0.4: R22.1 70.507,44.332 v1(70.85,44.675)
IO2: JP201.5 U200.32 | length 10.2
  Top Layer w0.3: v2(130.025,48.825) 130.575,48.825 131.35,48.05 133.804,48.05 U200.32
  Bottom Layer w0.3: JP201.5 127.24,46.04 v2(130.025,48.825)
IO3: JP201.6 U200.1 | length 8.6
  Top Layer w0.3: v2@130.525,47.45 132.601,47.45 U200.1
  Bottom Layer w0.3: JP201.6 126.9,44.05 130.3,47.45 v2@130.525,47.45
  other v2: 130.4,47.45
IO4: JP201.7 U200.2 | length 11
  Top Layer w0.3: U200.2 134.125,44.795 v2(134.125,44.4)
  Bottom Layer w0.3: JP201.7 130.685,40.96 v2(134.125,44.4)
IO5: JP201.8 U200.9 | length 3.6
  Top Layer w0.3: JP201.8 126.9,38.57 U200.9
IO6: JP201.9 U200.10 | length 5.8
  Top Layer w0.3: JP201.9 128.1,37.08 128.1,38.639 U200.10
IO7: JP201.10 U200.11 | length 8
  Top Layer w0.3: JP201.10 128.2,34.64 128.2,36.25 128.675,36.725 128.675,38.082 U200.11
IO8: JP201.11 U200.12 | length 10.2
  Top Layer w0.3: JP201.11 128.3,32.2 128.3,33.35 128.8,33.85 128.8,35.75 129.325,36.275 129.325,37.601 U200.12
IO9: JP201.12 U200.13 | length 12.4
  Top Layer w0.3: JP201.12 128.45,29.81 128.45,31.475 128.975,32 128.975,32.95 129.375,33.35 129.375,35.325 129.975,35.925 129.975,37.119 U200.13
IO10: JP200.12 U200.14 | length 29.3
  Top Layer w0.3: v2(127.375,26.2) 129.2,28.025 129.2,31.325 130.05,32.175 130.05,34.85 130.525,35.325 130.525,36.538 U200.14
  Bottom Layer w0.3: v2(127.375,26.2) 127.555,26.2 129.515,28.16 JP200.12@141.9,28.16
IO11: JP200.11 U200.15 | length 18.7
  Top Layer w0.3: v2(130.65,31.3) 130.725,31.375 130.725,34.6 131.25,35.125 131.25,36.132 U200.15
  Bottom Layer w0.3: v2(130.65,31.3) 138.875,31.3 139.475,30.7 JP200.11@141.9,30.7
IO12: JP200.10 U200.16 | length 14.7
  Top Layer w0.3: v2(131.825,33.3) 131.5,33.625 131.5,34.225 131.95,34.675 131.95,35.7 U200.16
  Bottom Layer w0.3: v2(131.825,33.3) 131.885,33.24 JP200.10@141.9,33.24
IO13: JP200.9 R201.1 | length 2.6
  Bottom Layer w0.3: R201.1 140.468,35.193 141.055,35.78 JP200.9@141.9,35.78
IO13_: R201.2 U200.17 | length 6.3
  Top Layer w0.3: v2(133.25,35) 133.25,35.197 U200.17
  Bottom Layer w0.3: v2(133.25,35) 133.443,35.193 R201.2
NetA1_2: A1.2 R39.1 | length 5.5
  Bottom Layer w0.4: A1.2 72.693,10.303 R39.1
NetBT1_1: BT1.1 U2.3 | length 29.3
  Top Layer w0.4: v1(89.1,40.425) 89.325,40.65 v1(104.925,40.65)
  Bottom Layer w0.3: BT1.1@106.975,40.175 BT1.1
  Bottom Layer w0.4: U2.3 86.66,33.66 89.1,36.1 v1(89.1,40.425) ; v1(104.925,40.65) 105.175,40.9 BT1.1
NetC1_2: C1.2 U2.1 Y1.1 | length 12.6
  Bottom Layer w0.4: C1.2 76.85,40.169 Y1.1 80.6,33.15 82.97,33.15 U2.1
NetC2_2: C2.2 U2.2 Y1.2 | length 12.1
  Bottom Layer w0.4: C2.2 79.407,36.993 79.95,36.45 81.9,34.5 84.275,34.5 85.39,33.385 U2.2
NetC3_1: C3.1 JP1.1 JP2.1 Q5.2 R23.1 U3.9 U4.1 | length 50
  Top Layer w0.4: JP2.1 126.833,20.584 127.974,21.725 131.099,21.725 132.874,23.5 135.424,23.5 135.174,23.25 135.174,9.875 139.225,5.824 JP1.1
  Bottom Layer w0.3: JP2.1 126.833,20.228 R23.1 ; U3.9 129.857,14.434 130.274,14.85 132.399,14.85 132.749,14.5 132.749,14.1 133.024,13.825 v1(135.149,13.825) ; JP1.1 139.225,6.4 Q5.2@140.8,7.975
  Bottom Layer w0.4: v1(135.149,20.45) 135.205,20.507 C3.1
NetC3_2: C3.2 JP1.3 JP2.5 U3.7 U4.3 | length 3.7
  Bottom Layer w0.3: v1(131.149,13.525) 131.157,13.516 U3.7 ; v1(139.674,22.525) 139.711,22.487 C3.2
NetC10_1: C10.1 JP7.1 R28.1 | length 23.1
  Bottom Layer w0.5: C10.1 R28.1 42.443,18.693 42.175,18.425 42.175,6.525 JP7.1
NetC11_1: C11.1 JP8.1 R31.1 | length 28.5
  Top Layer w0.5: v1(24.25,4.575) 29.025,4.575 JP8.1
  Bottom Layer w0.5: v1(24.25,4.575) 24.3,4.575 27.393,7.668 R31.1 C11.1
NetC14_2: C14.2 U1.6 | length 11.9
  Bottom Layer w0.3: C14.2 49.041,11.288 U1.6
NetD1_1: D1.1 JP4.1 | length 5.5
  Bottom Layer w1: JP4.1 16.006,7.857 D1.1
NetD3_1: D3.1 JP500.2 | length 3.8
  Bottom Layer w0.6: JP500.2 92.35,3.7 D3.1
NetJP1_2: JP1.2 Q5.3 | length 7.3
  Bottom Layer w0.3: JP1.2@134.426,4.1 JP1.2 134.399,3.899 138.702,8.202 Q5.3
NetJP2_3: JP2.3 U3.18 | length 8.9
  Bottom Layer w0.3: JP2.3 128.705,15.9 133.357,15.9 133.757,16.3 U3.18
NetJP2_4: JP2.4 U3.4 | length 8
  Bottom Layer w0.3: JP2.4 127.996,10.325 130.149,10.325 130.324,10.5 132.824,10.5 133.107,10.784 U3.4
NetJP5_1: JP5.1 U5.6 U6.6 U7.6 | length 34.2
  Top Layer w1: U5.6 111.385,5.66 117.825,12.1 117.825,24.725 116.29,26.26 U7.6 ; U6.6 117.76,15.96 117.825,16.025 ; 117.825,12.425 117.906,12.506 JP5.1
NetJP5_2: JP5.2 U5.4 | length 15.4
  Bottom Layer w1: U5.4 114.09,10.74 120.856,17.506 JP5.2
NetJP6_1: JP6.1 U6.4 | length 8
  Bottom Layer w1: U6.4 119.715,21.04 121.281,22.606 JP6.1
NetJP6_2: JP6.2 U7.4 | length 8.9
  Bottom Layer w1: U7.4 116.199,31.34 119.933,27.606 JP6.2
NetJP7_2: JP7.2 R29.2 R32.2 | length 19.2
  Bottom Layer w0.5: R29.2 39.607,18.199 R32.2 40.812,2.888 JP7.2
NetJP8_2: JP8.2 R33.2 | length 12.3
  Bottom Layer w0.5: JP8.2 26.101,3.551 32.262,9.712 R33.2
NetQ1_1: Q1.1 R1.1 | length 7.5
  Bottom Layer w0.4: Q1.1 20.273,55.7 25.275,55.7 26.287,56.712 R1.1
NetQ2_1: Q2.1 R2.1 | length 7.5
  Bottom Layer w0.4: Q2.1 20.182,51.075 23.725,51.075 24.488,50.312 R2.1
NetQ3_1: Q3.1 R3.1 | length 18.2
  Bottom Layer w0.4: Q3.1 21.249,45.4 22.725,45.4 24.7,43.425 24.7,36.525 23.207,35.032 R3.1
NetQ4_1: Q4.1 R4.1 | length 4.9
  Bottom Layer w0.4: R4.1 18.007,40.76 Q4.1
NetQ5_1: Q5.1 R24.2 | length 6.3
  Bottom Layer w0.3: R24.2 136.856,10.075 140.776,10.075 Q5.1
NetQ6_1: Q6.1 R33.1 R34.1 | length 7.1
  Bottom Layer w0.5: R33.1 36.212,13.918 36.212,18.234 Q6.1
NetR23_2: R23.2 U3.17 U4.2 | length 6.4
  Bottom Layer w0.3: R23.2 132.83,20.907 132.924,21 133.107,20.816 U3.17
NetR24_1: R24.1 U3.2 | length 3.3
  Bottom Layer w0.3: R24.1@132.786,9.212 134.407,10.834 U3.2
NetR25_1: R25.1 U5.2 | length 3.2
  Bottom Layer w0.4: R25.1 102.283,8.193 U5.2
NetR26_1: R26.1 U6.2 | length 3.2
  Bottom Layer w0.4: R26.1 107.383,18.493 U6.2
NetR27_1: R27.1 U7.2 | length 18.4
  Top Layer w0.4: v1(98.4,20.05) 99.35,19.1 102.575,19.1 103.95,20.475 v1(103.95,20.925)
  Bottom Layer w0.4: v1(98.4,20.05) 98.4,18.506 R27.1 ; v1(103.95,20.925) 105.35,22.325 105.35,27.55 106.6,28.8 U7.2
NetR35_1: R35.1 S1.1 | length 21.3
  Bottom Layer w0.5: R35.1 11.225,38.831 11.225,49.235 13.999,52.009 S1.1@13.999,58.009
NetR36_1: R36.1 S2.1 | length 9.4
  Bottom Layer w0.5: S2.1@13.999,47.509 13.999,41.509 14.007,41.501 R36.1
NetR37_1: R37.1 S3.1 | length 22.1
  Top Layer w0.5: v1(49.707,57.232) 50.663,56.275 61.265,56.275 S3.1@62.999,58.009
  Bottom Layer w0.5: R37.1 v1(49.707,57.232) ; S3.1@62.999,52.009 S3.1@62.999,58.009
NetR38_1: R38.1 S4.1 | length 23.9
  Top Layer w0.5: v1(53.975,45.25) 61.725,45.25 62.999,46.524 S4.1@62.999,47.509
  Bottom Layer w0.4: v1(53.975,45.25) 54.007,45.218 R38.1
  Bottom Layer w0.5: S4.1@62.999,41.509 S4.1@62.999,47.509
PA3: JP500.7 U1.9 | length 54.6
  Top Layer w0.4: v1(48.375,13.35) 56.625,13.35 57.8,14.525 59.45,14.525 60.15,13.825 63.975,13.825 66.4,16.25 68.275,16.25 68.699,16.674 83.074,16.674 83.5,17.1 v1(84.85,17.1)
  Bottom Layer w0.3: v1(48.375,13.35) 48.982,13.35 U1.9
  Bottom Layer w0.4: v1(84.85,17.1) 84.625,16.875 84.625,12.895 JP500.7
PA4: JP500.3 U1.10 | length 58
  Top Layer w0.4: v1(45.075,9.825) 46.075,8.825 63.375,8.825 64.996,7.204 66.125,6.075 75.4,6.075 75.7,5.775 85.735,5.775 JP500.3
  Bottom Layer w0.3: v1(45.075,9.825) 45.075,11.6 47.85,14.375 49.3,14.375 U1.10
PA5: JP500.4 U1.11 | length 64.3
  Top Layer w0.4: v1(43.325,9.45) 44.65,8.125 62.9,8.125 65.65,5.375 74.675,5.375 75.075,4.975 87.475,4.975 JP500.4
  Bottom Layer w0.3: v1(43.325,9.45) 43.325,10.925 47.4,15 49.218,15 U1.11
PA6: D4.2 R40.2 U1.12 | length 53.8
  Top Layer w0.4: v1(9.025,25.875) 9.85,25.875 12.05,23.675 15.8,23.675 17.1,24.975 49.15,24.975 v1(50.825,23.3)
  Bottom Layer w0.3: v1(50.825,23.3) 51.05,23.075 51.05,21.575 52.525,20.1 53.611,20.1 U1.12
  Bottom Layer w0.4: D4.2 9.009,25.891 v1(9.025,25.875) ; v1(16.325,24.2) 16.637,23.888 R40.2
PB0: R5.2 R35.2 U1.22 | length 91.3
  Top Layer w0.4: v1(10.55,33.325) 12.35,31.525 47,31.525 47.275,31.25 50.85,31.25 51.975,32.375 v1(52.025,32.375) ; v1(32.307,46.807) 32.375,46.875 43.175,46.875 43.475,46.575 51.95,46.575 v1(52.025,46.65)
  Bottom Layer w0.3: v1(52.025,46.65) 52.025,31.05 U1.22
  Bottom Layer w0.4: v1(32.307,46.807) R5.2
  Bottom Layer w0.5: R35.2 10.507,33.368 v1(10.55,33.325)
PB1: R6.2 R36.2 U1.21 | length 75.2
  Top Layer w0.4: v1(13.925,33.375) 14.65,32.65 47.125,32.65 47.625,32.15 49.65,32.15 v1(50.775,33.275) ; v1(44.425,47.825) 50.775,47.825 v1(50.8,47.85)
  Bottom Layer w0.3: v1(50.8,47.85) 50.8,31.568 U1.21
  Bottom Layer w0.4: R6.2 43.907,48.343 v1(44.425,47.825)
  Bottom Layer w0.5: v1(13.925,33.375) 14.007,33.457 R36.2
PB2: R7.2 R37.2 U1.20 | length 45
  Top Layer w0.4: v1(37.425,49.875) 37.725,49.575 41.825,49.575 42.5,50.25 49.575,50.25 v1(49.65,50.175)
  Bottom Layer w0.3: R37.2 49.65,52.656 v1(49.65,50.175) 49.7,50.125 49.7,31.961 U1.20
  Bottom Layer w0.4: R7.2 37.393,49.843 v1(37.425,49.875)
PB3: R8.2 R38.2 U1.19 | length 39.9
  Top Layer w0.4: v1(31.225,33.9) 47.975,33.9 v1(48.375,33.5) 49.375,34.5 51.95,34.5 53.35,33.1 v1(53.925,33.1)
  Bottom Layer w0.3: v1(48.375,33.5) 48.375,32.579 U1.19
  Bottom Layer w0.4: R8.2 31.207,33.918 v1(31.225,33.9) ; v1(53.925,33.1) 54.007,33.182 R38.2
PB4: R9.2 U1.18 | length 21.9
  Bottom Layer w0.3: R9.2 47.237,40.512 45.55,38.825 45.55,34.696 U1.18
PB5: R10.2 U1.17 | length 44.8
  Top Layer w0.4: v1(36.95,51.325) 37.025,51.25 46.45,51.25 v1(46.85,51.65)
  Bottom Layer w0.3: v1(46.85,51.65) 46.85,45.825 46.025,45 46.025,40.15 45,39.125 45,34.539 U1.17
  Bottom Layer w0.4: R10.2 36.763,51.512 v1(36.95,51.325)
PB6: R11.2 U1.16 | length 16.9
  Bottom Layer w0.3: R11.2 43.407,35.426 U1.16
PB7: R12.2 U1.15 | length 18.8
  Bottom Layer w0.3: R12.2 43.813,34.312 U1.15
PC0: R13.2 U1.26 | length 50.1
  Top Layer w0.4: v1(65.525,52.3) 84.95,52.3 v1(84.975,52.325)
  Bottom Layer w0.3: U1.26 65.525,31.307 v1(65.525,52.3) ; v1(84.975,52.325) v1@85.088,52.212
  Bottom Layer w0.4: v1@85.088,52.212 R13.2
PC0A: JP200.8 U200.23 | length 4.3
  Top Layer w0.3: U200.23 140.6,38.32 JP200.8@141.9,38.32
PC1: R14.2 U1.27 | length 63.7
  Top Layer w0.4: v1(67.325,51.2) 67.375,51.15 87.15,51.15 88.525,52.525 v1(99.825,52.525)
  Bottom Layer w0.3: U1.27 66.15,31.225 66.15,50.025 v1(67.325,51.2)
  Bottom Layer w0.4: R14.2 97.419,52.525 v1(99.825,52.525)
PC1A: JP200.7 U200.24 | length 2.9
  Top Layer w0.3: U200.24 141.761,40.999 JP200.7@141.9,40.86
PC2: R17.2 U1.28 | length 55.7
  Top Layer w0.4: v1(67.35,47.75) 67.65,48.05 93.475,48.05 94.2,47.325 v1(94.9,47.325)
  Bottom Layer w0.3: U1.28 66.75,31.118 66.75,47.15 v1(67.35,47.75)
  Bottom Layer w0.4: R17.2 92.556,47.325 v1(94.9,47.325)
PC2A: JP200.6 U200.25 | length 3.1
  Top Layer w0.3: U200.25 141.302,42.802 JP200.6@141.9,43.4
PC3: R18.2 U1.29 | length 44.1
  Top Layer w0.4: v1(68.175,46.475) 68.725,47.025 84.25,47.025 v1(84.625,46.65)
  Bottom Layer w0.3: U1.29 67.4,31.061 67.4,45.7 v1(68.175,46.475)
  Bottom Layer w0.4: v1(84.625,46.65) 86.256,46.65 R18.2
PC3A: JP200.5 U200.26 | length 4.5
  Top Layer w0.3: U200.26 139.643,44.525 140.125,44.525 141.54,45.94 JP200.5@141.9,45.94
PC4: R19.2 U1.30 | length 37.3
  Top Layer w0.4: v1(69.175,45.375) 69.825,46.025 78.775,46.025 v1(79.625,45.175)
  Bottom Layer w0.3: U1.30 67.975,30.929 67.975,44.175 v1(69.175,45.375)
  Bottom Layer w0.4: v1(79.625,45.175) 79.638,45.188 R19.2
PC5: R20.2 U1.33 | length 53.2
  Top Layer w0.4: v1(70.35,34.15) 70.725,33.775 90.6,33.775 v1(91.025,34.2)
  Bottom Layer w0.3: U1.33 69.25,30.082 69.25,33.25 70.15,34.15 v1(70.35,34.15)
  Bottom Layer w0.4: R20.2 90.107,44.693 91.025,43.775 v1(91.025,34.2)
PC6: R21.2 U1.34 | length 38
  Top Layer w0.4: v1(70.275,32.6) 70.425,32.75 92.075,32.75 v1(92.85,33.525)
  Bottom Layer w0.3: U1.34 70.775,30.9 70.775,32.1 v1(70.275,32.6)
  Bottom Layer w0.4: v1(92.85,33.525) 93.237,33.912 R21.2
PD0: JP500.8 U1.41 | length 37.3
  Top Layer w0.4: v1(68.36,15.115) 68.79,15.115 69.55,15.875 83.5,15.875 83.65,16.025 89.35,16.025 90.35,17.025 v1(90.35,17.1)
  Bottom Layer w0.3: U1.41 65.561,16.1 67.375,16.1 v1(68.36,15.115)
  Bottom Layer w0.4: JP500.8 89.295,11.32 90.325,12.35 90.325,17.075 v1(90.35,17.1)
PD1: JP3.3 U1.42 | length 27.6
  Top Layer w0.4: v1@58.825,13.525 v1(58.75,13.45) 59.425,13.45 59.975,12.9 64.65,12.9 v1(66.775,15.025)
  Bottom Layer w0.3: U1.42 65.929,15.025 v1(66.775,15.025)
  Bottom Layer w0.4: JP3.3 58.75,4.413 v1(58.75,13.45)
PD2: R1.2 U1.43 | length 111.9
  Top Layer w0.4: v1(28.25,27.25) 28.875,27.875 53.475,27.875 54.55,28.95 76.45,28.95 v1@77,28.4 ; v1(68.075,13.6) 68.125,13.55 v1(77.325,13.55)
  Bottom Layer w0.3: U1.43 66.646,13.6 v1(68.075,13.6)
  Bottom Layer w0.4: R1.2 28.625,51.794 28.625,46.175 26.75,44.3 26.75,31.55 28.25,30.05 v1(28.25,27.25) ; v1@77,28.4 77.65,27.75 77.65,19.7 78.075,19.275 78.075,17.175 77.65,16.75 77.65,13.875 v1(77.325,13.55)
  other v1: 77.1,28.475
PD3: R2.2 U1.44 | length 109.2
  Top Layer w0.4: v1(26.85,28.225) 27.275,28.65 52.975,28.65 54.125,29.8 77.85,29.8 v1(78.175,29.475) ; v1(70.9,12.225) 78.05,12.225 v1(78.25,12.425)
  Bottom Layer w0.3: U1.44 67.039,12.5 v1@70.625,12.5
  Bottom Layer w0.4: R2.2 25.675,46.681 25.675,31.15 26.85,29.975 v1(26.85,28.225) ; v1@70.625,12.5 v1(70.9,12.225) ; v1(78.175,29.475) 78.55,29.1 78.55,20.45 78.825,20.175 78.825,16.675 78.55,16.4 78.55,12.7 78.275,12.425 v1(78.25,12.425)
PD4: R3.2 U1.45 | length 98
  Top Layer w0.4: v1(25.325,29.1) 25.725,29.5 52.55,29.5 53.65,30.6 79.1,30.6 v1(79.425,30.275) ; v1(69.1,11.35) 69.4,11.05 71.5,11.05 71.825,11.375 73.35,11.375 73.675,11.05 79.1,11.05 v1(79.4,11.35)
  Bottom Layer w0.3: U1.45 67.257,11.575 68.875,11.575 v1(69.1,11.35)
  Bottom Layer w0.4: R3.2 24.813,29.612 v1(25.325,29.1) ; v1(79.4,11.35) 79.425,11.375 79.425,15.725 79.725,16.025 79.725,20.75 79.425,21.05 v1(79.425,30.275)
PD5: R4.2 U1.46 | length 113.5
  Top Layer w0.4: v1(18.025,30.45) 52.25,30.45 53.225,31.425 v1(80.6,31.425) ; v1@68,10.05 v1(67.95,10.1) 69.7,10.1 71.25,8.55 73.05,8.55 74.55,10.05 v1(80.525,10.05)
  Bottom Layer w0.3: U1.46 67.95,10.175 v1(67.95,10.1)
  Bottom Layer w0.4: R4.2 18.007,30.468 v1(18.025,30.45) ; v1(80.525,10.05) 80.6,10.125 v1(80.6,31.425)
PD6: Q6.3 R30.2 U1.47 | length 43.7
  Top Layer w0.4: v1(30.7,16.05) 32.125,14.625 56.8,14.625 57.775,15.6 59.525,15.6 60.2,14.925 v1(61.65,14.925)
  Bottom Layer w0.3: U1.47 61.65,15.768 v1(61.65,14.925)
  Bottom Layer w0.4: v1(30.7,16.05) 30.7,20.606 R30.2 31.121,20.998 Q6.3
PD7: D2.2 R32.1 U1.48 | length 35
  Top Layer w0.4: v1(43.275,12.8) 44.125,11.95 49.3,11.95 49.725,12.375 59.475,12.375 v1(60.775,11.075)
  Bottom Layer w0.3: U1.48 60.65,16.061 60.65,11.2 v1(60.775,11.075)
  Bottom Layer w0.4: v1(43.275,12.8) 43.612,13.137 R32.1 43.889,16.993 D2.2
PE0: R25.2 U1.40 | length 43.9
  Top Layer w0.4: v1(70.2,14.775) 70.125,14.775 70.15,14.8 84.35,14.8 84.8,15.25 89.825,15.25 90.475,15.9 v1(96.325,15.9)
  Bottom Layer w0.3: U1.40 65.668,16.7 68.275,16.7 v1(70.2,14.775)
  Bottom Layer w0.4: R25.2 96.312,15.887 v1(96.325,15.9)
PE1: R15.2 U1.39 U2.6 | length 45.5
  Top Layer w0.4: v1(69.55,24) 70.15,24.6 90.625,24.6 91.35,25.325 91.35,26.95 v1(90.7,27.6)
  Bottom Layer w0.3: U1.39 64.25,18.825 66.75,18.825 68.55,20.625 68.55,23.175 69.375,24 v1(69.55,24)
  Bottom Layer w0.4: R15.2 86.66,23.834 86.66,28.06 87.575,28.975 89.325,28.975 v1(90.7,27.6)
PE2: R16.2 U1.38 U2.5 | length 40.8
  Top Layer w0.4: v1(69.025,25.45) 89.175,25.45 v1(89.725,26)
  Bottom Layer w0.3: U1.38 64.307,19.475 66.45,19.475 67.825,20.85 67.825,24.25 v1(69.025,25.45)
  Bottom Layer w0.4: R16.2@87.275,20.5 88.65,20.5 89.65,21.5 89.65,25.03 U2.5 ; 89.219,25.461 89.219,25.494 v1(89.725,26)
PE3: R26.2 U1.37 | length 40
  Top Layer w0.4: v1(66.425,21.2) 100.55,21.2 v1(101.35,20.4)
  Bottom Layer w0.3: U1.37 65.87,20.645 v1(66.425,21.2)
  Bottom Layer w0.4: v1(101.35,20.4) 101.412,20.338 R26.2
PE5: R27.2 U1.25 | length 46.3
  Top Layer w0.4: v1(60.525,27.75) 60.925,28.15 75.55,28.15 76.45,27.25 v1(76.6,27.1) ; v1(76.95,18.05) 77.125,18.225 v1(93.95,18.225)
  Bottom Layer w0.3: U1.25 60.525,27.014 v1(60.525,27.75)
  Bottom Layer w0.4: v1(76.6,27.1) 76.95,26.75 v1(76.95,18.05) ; v1(93.95,18.225) 95.4,18.225 95.568,18.393 R27.2
PE6: JP500.5 U1.24 | length 45.7
  Top Layer w0.4: v1(58.275,27.15) 59.475,25.95 65.925,25.95 69.05,22.825 74.3,22.825 v1@75.025,23.55 ; v1@75,8.8 v1(75.02,8.78) JP500.5
  Bottom Layer w0.3: U1.24 58.275,26.673 v1(58.275,27.15)
  Bottom Layer w0.4: v1(75.02,8.78) 74.875,8.925 74.875,23.4 v1@75.025,23.55
  other v1: 74.875,23.275
PE7: JP500.6 U1.23 | length 55.8
  Top Layer w0.4: v1(56.625,27.9) 56.875,28.15 59.05,28.15 59.325,27.875 59.325,27.325 60,26.65 61.1,26.65 61.775,27.325 74.6,27.325 v1(75.125,26.8) ; v1(76.425,7.2) 76.775,7.55 87.51,7.55 JP500.6
  Bottom Layer w0.3: v1(56.625,27.9) 56.55,27.825 56.55,27.232 U1.23
  Bottom Layer w0.4: v1(75.125,26.8) 76.1,25.825 76.1,19.2 75.7,18.8 75.7,12 76.375,11.325 76.375,7.25 v1(76.425,7.2)
PG0: R22.2 U1.35 | length 20
  Bottom Layer w0.3: U1.35 71.325,30.743 71.325,35.05 70.475,35.9 R22.2@70.475,39.325
PG1: R39.2 U1.36 | length 18.5
  Bottom Layer w0.3: U1.36 68.289,27 69.375,27
  Bottom Layer w0.4: 69.375,27 71,27 72.693,25.307 R39.2
RESET: C202.1 JP200.3 JP201.3 R200.2 U200.29 | length 29.3
  Top Layer w0.3: JP201.3 129.28,53.5 130.875,53.5 131.912,54.537 C202.1 ; U200.29 137.975,46.251 137.975,47.275 138.325,47.625 138.325,47.9 v2(138.375,47.95)
  Bottom Layer w0.3: JP201.3 127.32,50.7 132.994,50.7 135.694,48 139.4,48 140.075,48.675 140.075,49.875 141.22,51.02 JP200.3@141.9,51.02 ; v2(138.375,47.95) 138.375,47.8 138.425,47.85 v2@138.425,48
RST: JP3.4 U1.1 | length 20
  Top Layer w0.4: JP3.4 55.547,3.75 58.9,3.75 v1(60.325,5.175)
  Bottom Layer w0.3: U1.1 58.045,16.505 59.8,14.75 59.8,5.7 v1(60.325,5.175)
RX: JP201.2 JP202.3 U200.30 | length 25.3
  Top Layer w0.3: JP202.3 134.18,56.47 135.35,55.3 135.725,54.925 136.525,54.925 138,53.45 138,49.775 137.35,49.125 137.35,46.757 U200.30
  Bottom Layer w0.3: JP201.2 128.485,53.66 133.475,58.65 JP202.3@134.3,58.65
TX: JP201.1 JP202.2 U200.31 | length 21.9
  Top Layer w0.3: JP202.2 131.64,57.91 133.99,55.56 135.275,54.275 136.175,54.275 137.35,53.1 137.35,50.075 136.75,49.475 136.75,47.289 U200.31
  Bottom Layer w0.3: JP201.1 129.14,56.2 JP202.2
XL1: C201.2 U200.7 Y200.2 | length 18
  Top Layer w0.3: U200.7 129.025,44.238 129.025,49.425 130.175,50.575 133.983,50.575 Y200.2
  Bottom Layer w0.3: Y200.2 137.596,49.812 C201.2
XL2: C200.2 U200.8 Y200.1 | length 15.9
  Top Layer w0.3: U200.8 128.375,43.756 128.375,49.967 Y200.1
  Bottom Layer w0.3: Y200.1 131.119,52 C200.2
XT1: C13.2 U1.2 Y2.2 | length 9.8
  Bottom Layer w0.3: C13.2 55.908,8.173 55.908,15.326 U1.2
XT2: C12.2 U1.3 Y2.1 | length 12
  Bottom Layer w0.3: C12.2@51.093,8.188 50.908,8.373 50.908,11.033 U1.3
pads on no net: BT1.0 HG1.6 JP1.0 JP7.0 JP8.0 U2.7 U3.1 U3.3 U3.5 U3.6 U3.8 U3.10 U3.11 U3.12 U3.13 U3.14 U3.15 U3.16 U3.19 U3.20 U5.3 U5.5 U6.3 U6.5 U7.3 U7.5 U200.20

## Polygon pours and split planes (outlines as drawn)
GND on Top Layer (hatched 90Degree grid 0.1 track 0.3, remove dead copper): -2.4,63.325 -2.4,-3.775 127.15,-3.775 127.15,62.95 -2.4,62.95
NetC3_2 on Top Layer (hatched 90Degree grid 0.1 track 0.3, remove dead copper): 144.825,-1.1 124.675,-1.1 124.675,25.45 143.975,25.45 143.975,-1.1
+5V on Bottom Layer (hatched 90Degree grid 0.1 track 0.3, remove dead copper): 52.925,21.75 59.075,27.9 65.325,21.65 59.075,15.4 52.85,21.625
GND on Bottom Layer (hatched 90Degree grid 0.1 track 0.3, remove dead copper): -3.4,63.175 -3.4,-4.05 126.65,-4.05 126.65,63.175
NetC3_2 on Bottom Layer (hatched 90Degree grid 0.1 track 0.3, remove dead copper): 144.325,-0.875 124.4,-0.875 124.4,25.55 144.275,25.55 144.275,-0.825

## Keep-outs
Keep-Out Layer:
  lines w0.254: 0,-0.025 0.025,0 143.5,0 143.5,60 0,60 0,-0.025

## Text inside footprints (layer, text, board x,y; h text height)
JP203: Top Overlay "3" at 134.464,26.392 h1.27; Top Overlay "4" at 134.464,28.932 h1.27; Top Overlay "2" at 127.86,28.932 h1.27; Top Overlay "1" at 128.368,26.392 h1.27
JP500: Bottom Overlay "10" at 88.232,15.384 h1 r270; Bottom Overlay "9" at 85.692,15.384 h1 r270; Bottom Overlay "1" at 85.692,1.668 h1 r270; Bottom Overlay "2" at 88.232,1.16 h1 r270
U8: Bottom Overlay "3" at 15.578,14.486 h1 r90; Bottom Overlay "1" at 15.578,19.308 h1 r90